# Altium PCB NavMergeBoard.PcbDoc
Units mil, origin at the board's own origin, x right, y up, seen from the top; angles counter-clockwise.
Board outline 2930 x 2770 mil, 4 copper layers (Top Layer, Internal Plane 1, Signal Layer 1, Bottom Layer), stack 30.634 mil thick; 104 components, 84 nets, 435 pads, 106 vias.
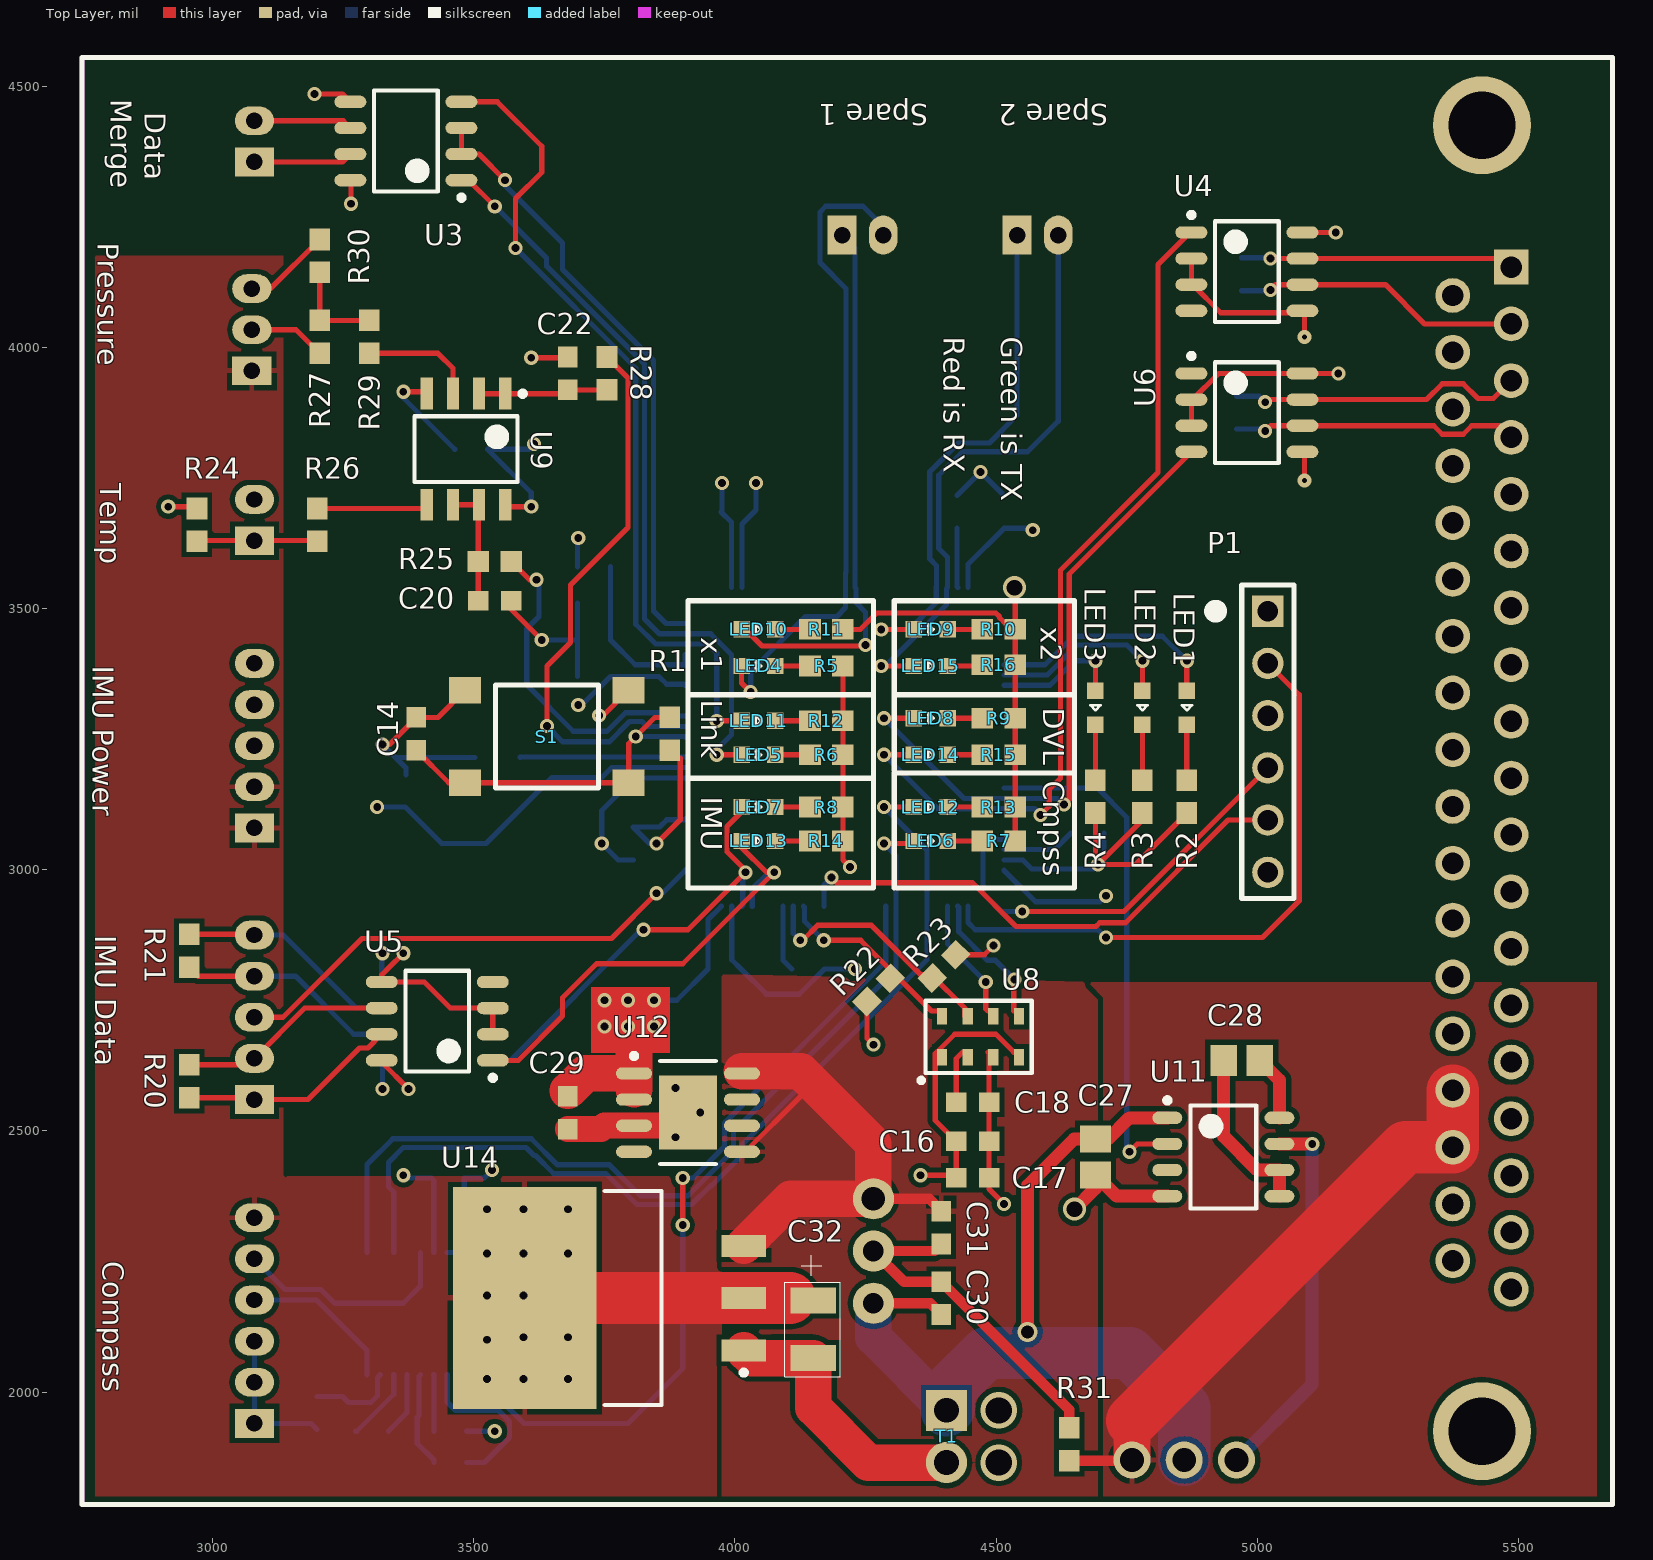
[diagram p0: Top Layer view]
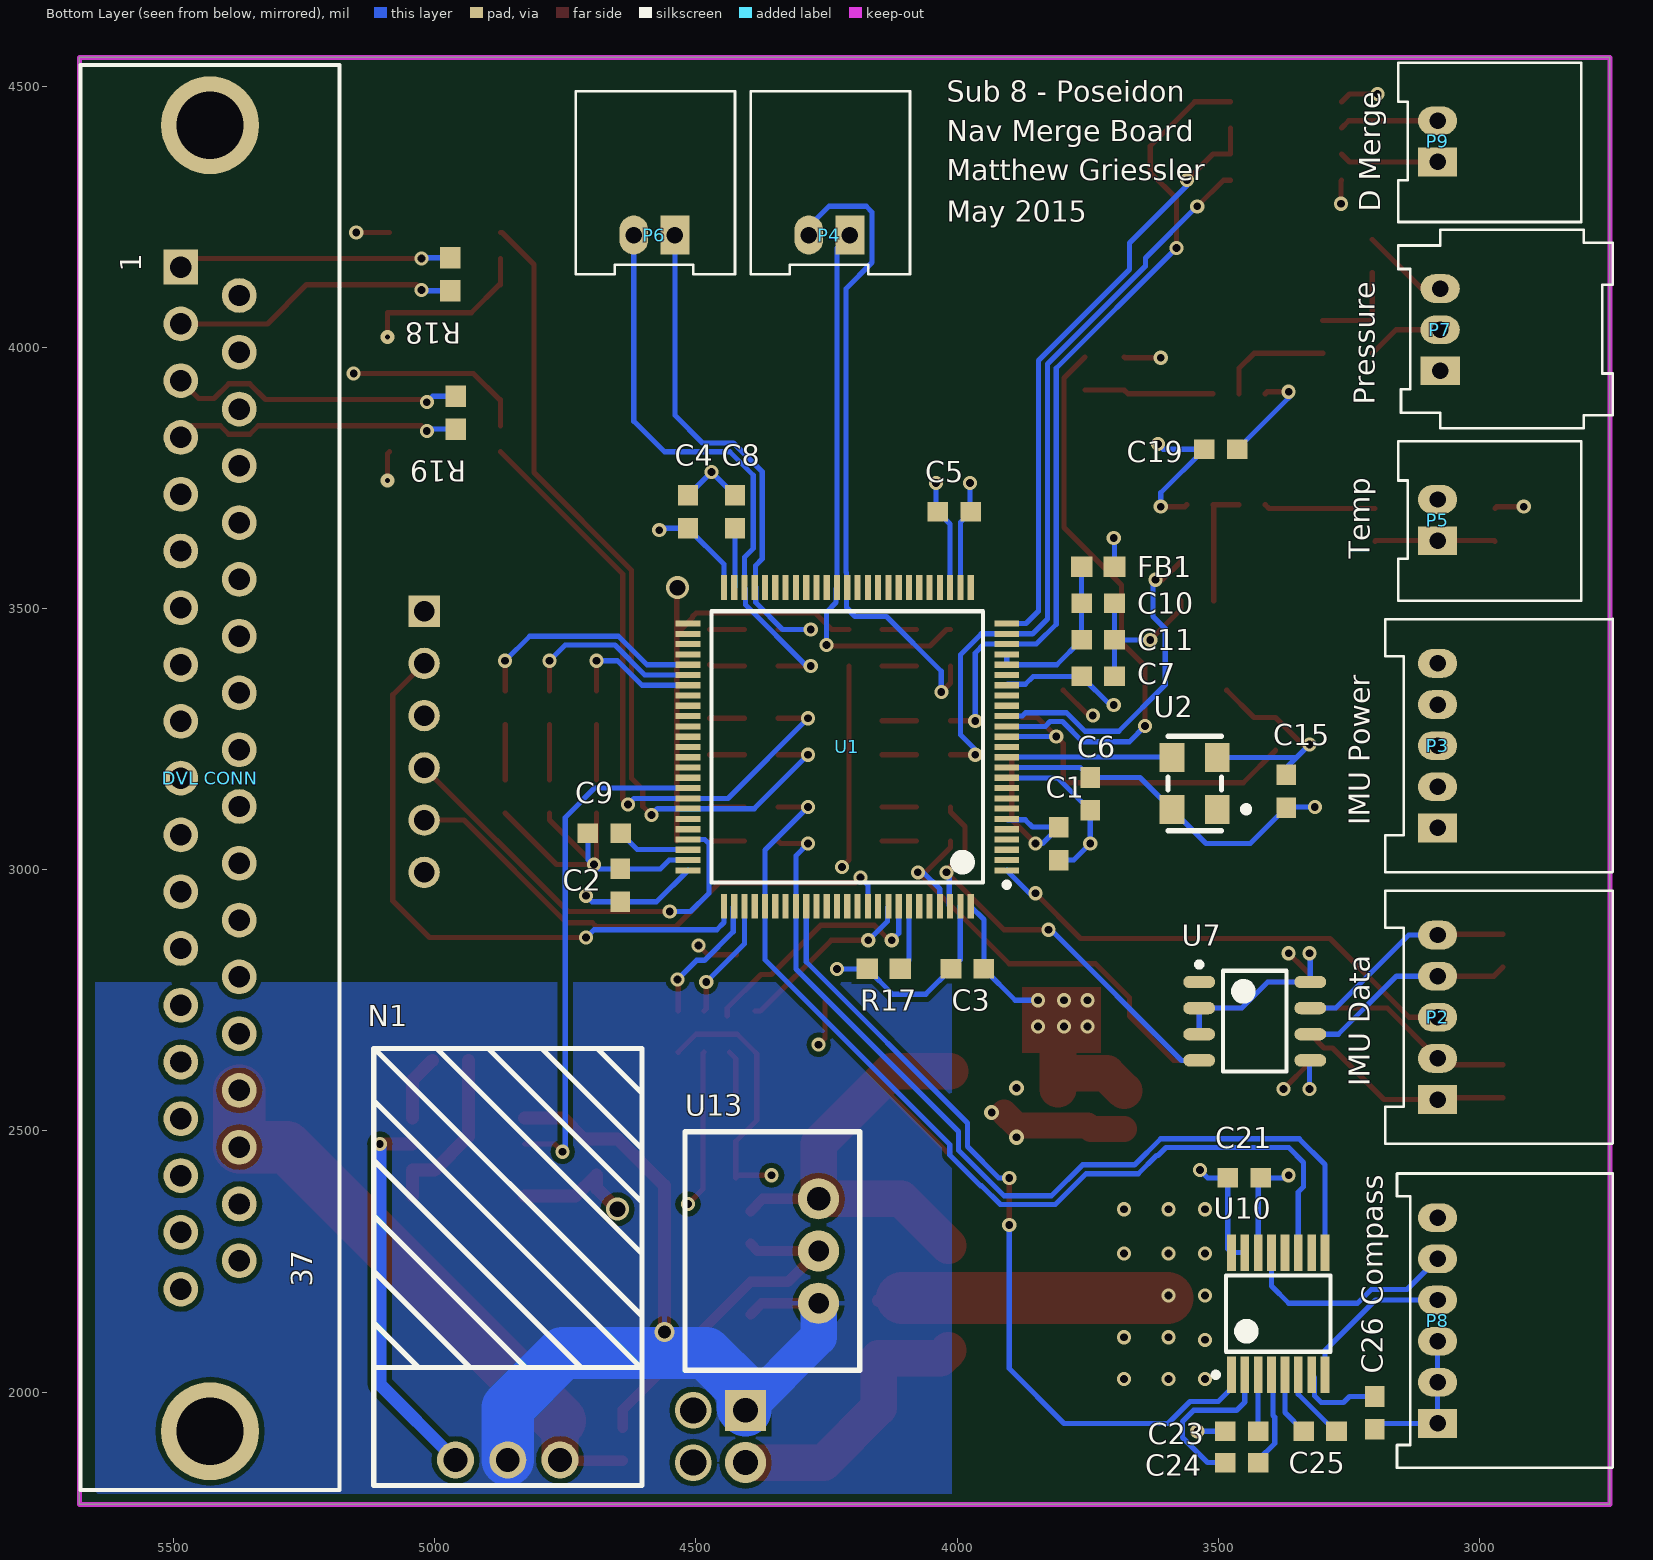
[diagram p1: Bottom Layer view, seen from below]
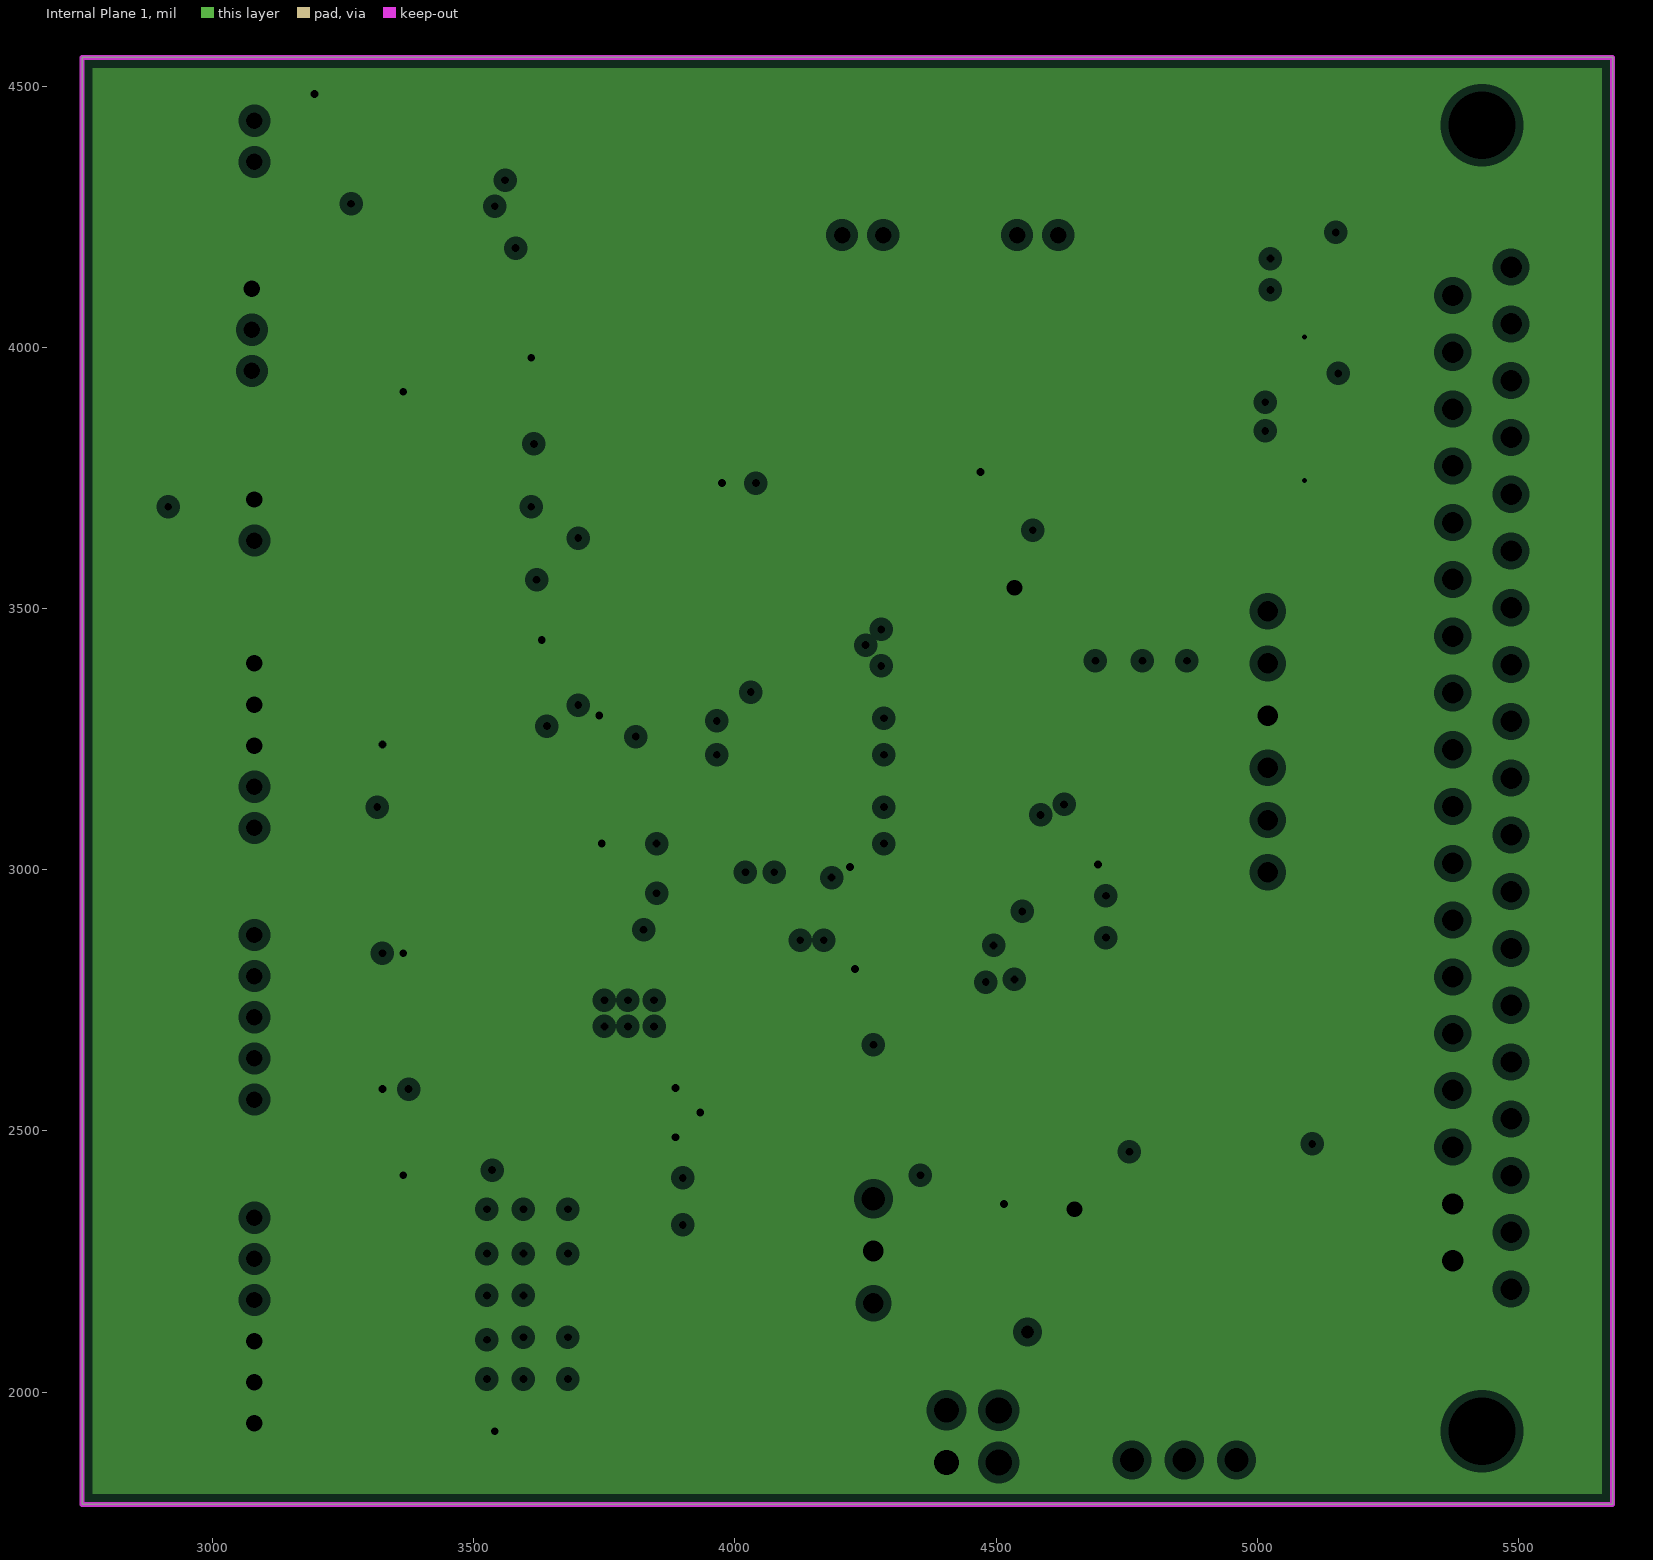
[diagram p2: Internal Plane 1, clearances drawn from the general rule]
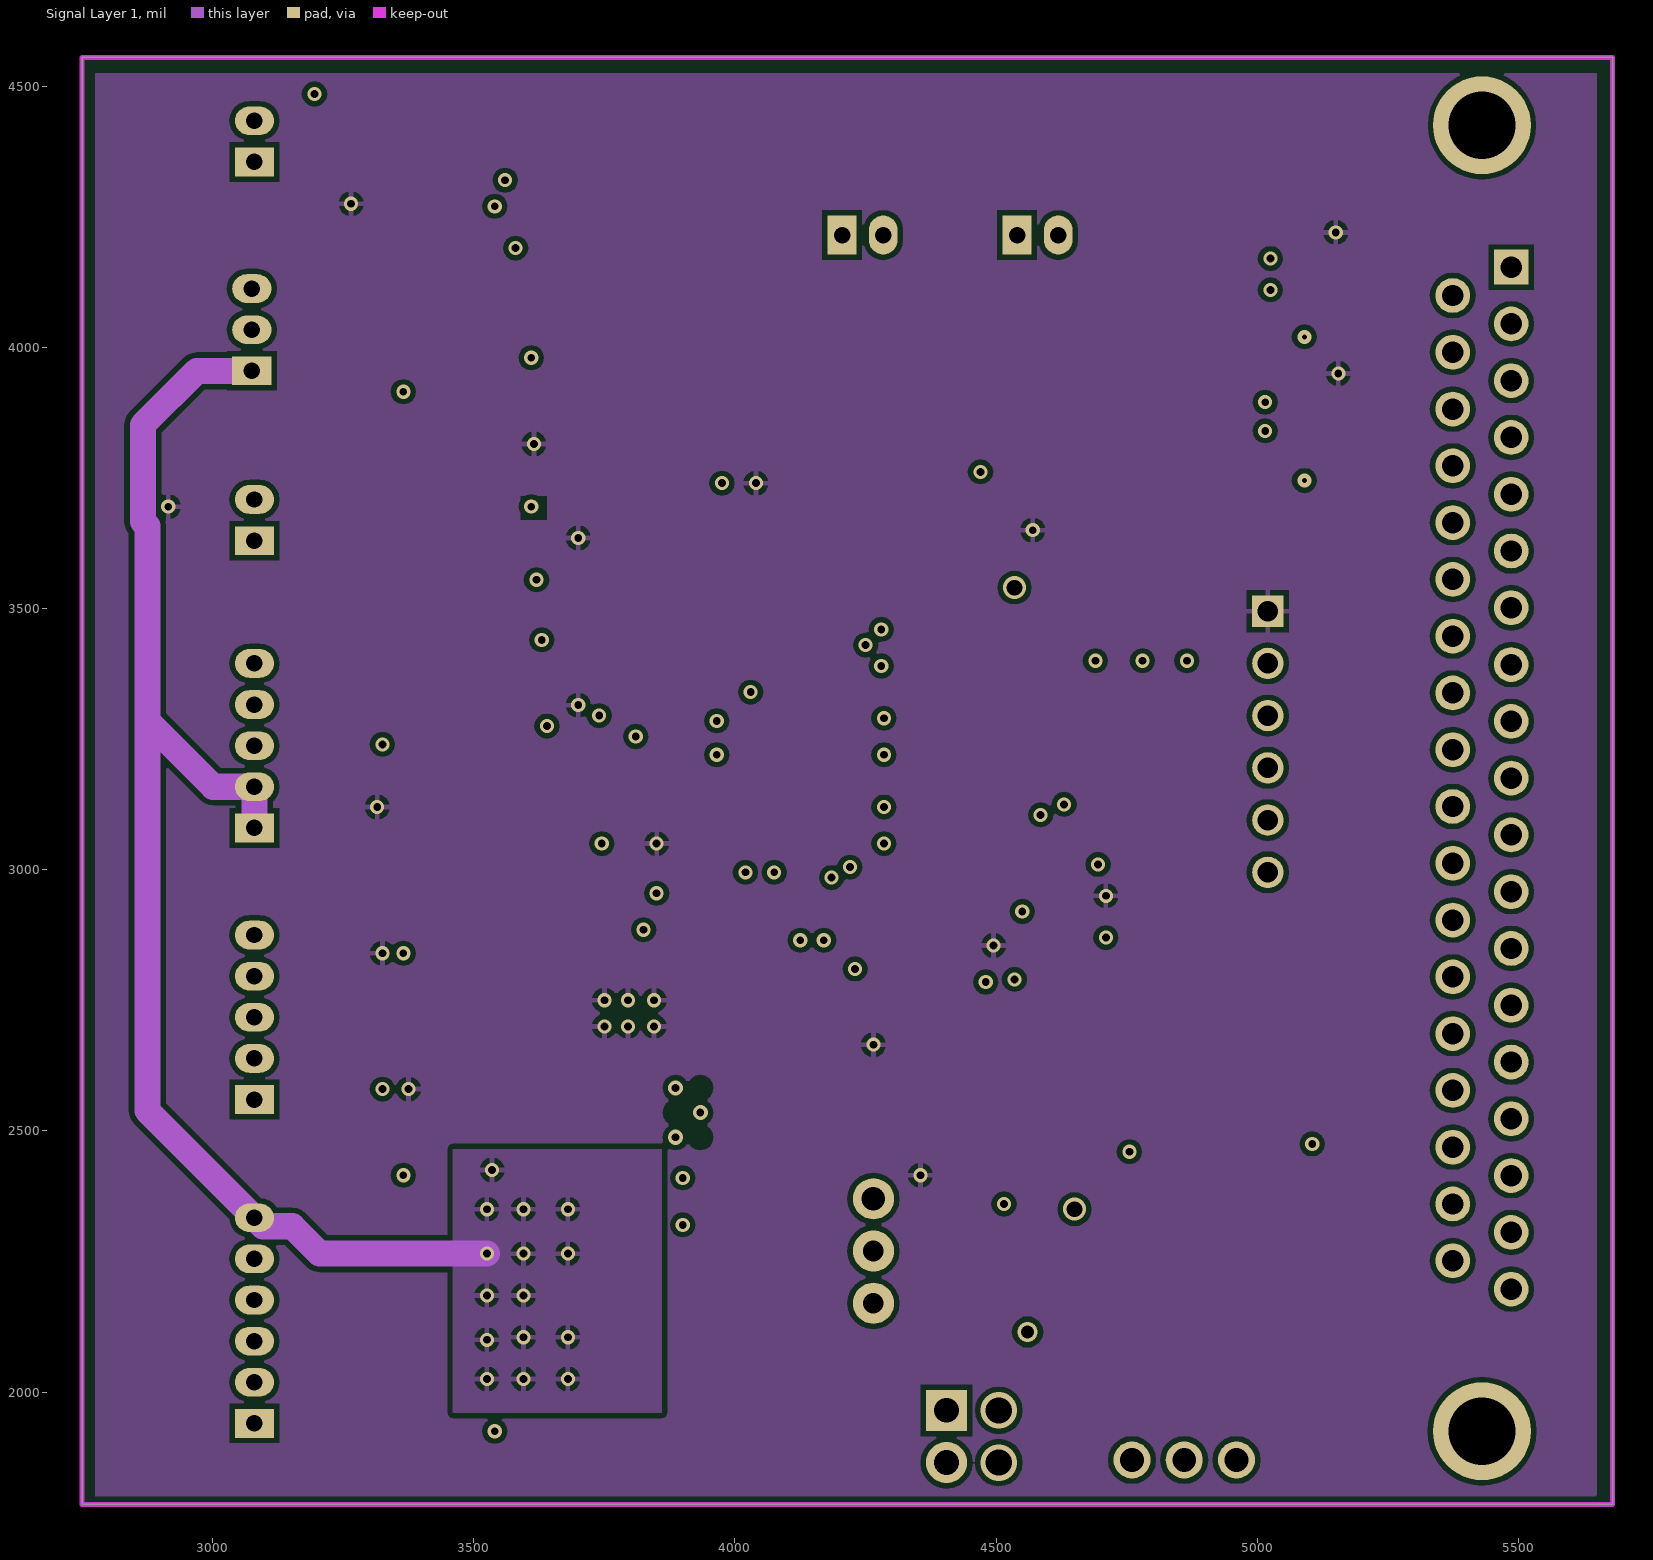
[diagram p3: Signal Layer 1]

## Layer stack, top to bottom
Top Solder: solder mask 0.4, Solder Resist, Dk 3.5
Top Layer: signal copper 1.4
Dielectric 1: core 10, FR-4, Dk 4.2
Internal Plane 1: plane copper 1.417, net GND
Dielectric 2: core 10, Dk 4.2
Signal Layer 1: signal copper 1.417
Dielectric 3: prepreg 5, Dk 4.2
Bottom Layer: signal copper 1.4
Bottom Solder: solder mask 0.4, Solder Resist, Dk 3.5

## Board outline
2750,1785 2750,4555 5680,4555 5680,1785

## Design rules (kind name [scope] priority, off if disabled: settings)
Clearance [All] p1: gap=10 except(7: Track-Track Track-SMDPad SMDPad-SMDPad)
HoleSize [All] p1: absolutevalues=TRUE maxlimit=400 minlimit=1 maxpercent=80.000 minpercent=20.000
MinimumAnnularRing MinimumAnnularRing_1 [IsPad] p1: minimumring=7
MinimumAnnularRing [IsVia] p2: minimumring=5
MinimumSolderMaskSliver [All] p1: minsoldermaskwidth=1
PlaneClearance [All] p1: clearance=15
PlaneConnect [All] p1: planeconnectstyle=Relief reliefexpansion=15 reliefentries=4 reliefconductorwidth=10 reliefairgap=10
PolygonConnect [All] p1: connectstyle=Relief reliefconductorwidth=10 reliefentries=4 polygonreliefangle="90 Angle" airgapwidth=10
RoutingVias [All] p1: holewidth=10 width=27 viastyle="Through Hole" minholewidth=10 minwidth=27 maxholewidth=28 maxwidth=50
SilkToSolderMaskClearance [IsPad] p1: minsilkscreentomaskgap=5 clearancetoexposedcopper=TRUE
SolderMaskExpansion [All] p1: expansion=4
Width [All] p1: maxlimit=100 minlimit=10 preferedwidth=10
25 further rules are at their usual default settings.

## Classes and differential pairs
component class CPU: C1 C2 C3 C4 C5 C6 C7 C8 C9 C10 C11 C14 C15 FB1 LED1 LED2 LED3 LED4 LED5 LED6 LED7 LED8 LED9 LED10 LED11 LED12 LED13 LED14 LED15 P1 P9 R1 R2 R3 R4 R5 R6 R7 R8 R9 R10 R11 R12 R13 R14 R15 R16 R17 S1 U1 U2 U3
component class NavMergeBoard: C16 C17 C18 C19 C20 C21 C22 C23 C24 C25 C26 "DVL CONN" P2 P3 P4 P5 P6 P7 P8 R18 R19 R20 R21 R22 R23 R24 R25 R26 R27 R28 R29 R30 U4 U5 U6 U7 U8 U9 U10
component class Power: C27 C28 C29 C30 C31 C32 N1 R31 T1 U11 U12 U13 U14

## Components (designator, comment, footprint, x,y, rotation, side; value= is the part's Value field where it differs from the comment)
C1 "Cap" CAPC0603 3805,3050 r270 bottom
C2 "Cap" CAPC0603 4645,2970 r90 bottom
C3 "Cap" CAPC0603 3980,2810 r0 bottom
C4 "Cap" CAPC0603 4515,3685 r90 bottom
C5 "Cap" CAPC0603 4005,3685 r180 bottom
C6 "Cap" CAPC0603 3745,3145 r270 bottom
C7 "Cap" CAPC0603 3730,3370 r180 bottom
C8 "Cap" CAPC0603 4425,3685 r90 bottom
C9 "Cap" CAPC0603 4675,3070 r0 bottom
C10 "Cap" CAPC0603 3730,3510 r180 bottom
C11 "Cap" CAPC0603 3730,3440 r180 bottom
C14 "Cap" CAPC0603 3390,3260 r90 top
C15 "Cap" CAPC0603 3370,3150 r90 bottom
C16 "Cap" CAPC0603 4455,2480 r0 top
C17 "Cap" CAPC0603 4455,2410 r0 top
C18 "Cap" CAPC0603 4455,2555 r0 top
C19 "Cap" CAPC0603 3495,3805 r180 bottom
C20 "Cap" CAPC0603 3540,3515 r0 top
C21 "Cap" CAPC0603 3450,2410 r180 bottom
C22 "Cap" CAPC0603 3680,3950 r90 top
C23 "Cap" CAPC0603 3455,1925 r0 bottom
C24 "Cap" CAPC0603 3455,1865 r180 bottom
C25 "Cap" CAPC0603 3305,1925 r180 bottom
C26 "Cap" CAPC0603 3200,1960 r270 bottom
C27 "Cap" CAPC0805 4690,2450 r270 top
C28 "Cap" CAPC0805 4970,2635 r180 top
C29 "Cap" CAPC0603 3680,2535 r270 top
C30 "Cap" CAPC0603 4395,2180 r90 top
C31 "Cap" CAPC0603 4395,2315 r270 top
C32 "Cap Tant" 1206 4150,2120 r270 top
"DVL CONN" "DB37" "DSUB37_ FEMALE" 5430,1925 r90 bottom
FB1 "FBead" RES0603 3730,3580 r180 bottom
LED1 "LED" LED0603 4865,3310 r270 top
LED2 "LED" LED0603 4780,3310 r270 top
LED3 "LED" LED0603 4690,3310 r270 top
LED4 "LED" LED0603 4045,3390 r0 top
LED5 "LED" LED0603 4045,3220 r0 top
LED6 "LED" LED0603 4375,3055 r0 top
LED7 "LED" LED0603 4045,3120 r0 top
LED8 "LED" LED0603 4375,3290 r0 top
LED9 "LED" LED0603 4375,3460 r0 top
LED10 "LED" LED0603 4045,3460 r0 top
LED11 "LED" LED0603 4045,3285 r0 top
LED12 "LED" LED0603 4375,3120 r0 top
LED13 "LED" LED0603 4045,3055 r0 top
LED14 "LED" LED0603 4375,3220 r0 top
LED15 "LED" LED0603 4375,3390 r0 top
N1 "NMOSFET_TO-220" "TO-220AB Heatsink" 4860,1870 r180 bottom
P1 "SWD" SWD_STM32 5020,3495 r0 top
P2 "MOLEX-HDR-1x5-SHERLOCK_RA" "MOLEX-HDR-1X5-SHERLOCK- RA" 3080,2560 r270 bottom
P3 "MOLEX-HDR-1x5-SHERLOCK_RA" "MOLEX-HDR-1X5-SHERLOCK- RA" 3080,3080 r270 bottom
P4 "2-pin Horz Sherlock" MOLEX-HDR-1X2-SHERLOCK-HORZ 4205,4215 r180 bottom
P5 "2-pin Horz Sherlock" MOLEX-HDR-1X2-SHERLOCK-HORZ 3080,3630 r270 bottom
P6 "2-pin Horz Sherlock" MOLEX-HDR-1X2-SHERLOCK-HORZ 4540,4215 r180 bottom
P7 "3pos RA sherlock connector" MOLEX-HDR-1X3-SHERLOCK-RA 3075,3955 r270 bottom
P8 "Sherlock 1x6 RA" "MOLEX-HDR-1X6-SHERLOCK- RA" 3080,1940 r270 bottom
P9 "2-pin Horz Sherlock" MOLEX-HDR-1X2-SHERLOCK-HORZ 3080,4355 r270 bottom
R1 "Res" RES0603 3875,3260 r90 top
R2 "Res" RES0603 4865,3140 r270 top
R3 "Res" RES0603 4780,3140 r270 top
R4 "Res" RES0603 4690,3140 r270 top
R5 "Res" RES0603 4175,3390 r0 top
R6 "Res" RES0603 4175,3220 r0 top
R7 "Res" RES0603 4505,3055 r0 top
R8 "Res" RES0603 4175,3120 r0 top
R9 "Res" RES0603 4505,3290 r0 top
R10 "Res" RES0603 4505,3460 r0 top
R11 "Res" RES0603 4175,3460 r0 top
R12 "Res" RES0603 4175,3285 r0 top
R13 "Res" RES0603 4505,3120 r0 top
R14 "Res" RES0603 4175,3055 r0 top
R15 "Res" RES0603 4505,3220 r0 top
R16 "Res" RES0603 4505.12,3392.48 r0 top
R17 "Res" RES0603 4140,2810 r0 bottom
R18 "Res" RES0603 4970,4140 r270 bottom
R19 "Res" RES0603 4960,3875 r270 bottom
R20 "Res" RES0603 2955,2595 r90 top
R21 "Res" RES0603 2955,2845 r270 top
R22 "Res" RES0603 4275,2770 r45 top
R23 "Res" RES0603 4400,2815 r225 top
R24 "Res" RES0603 2970,3660 r270 top
R25 "Res" RES0603 3540,3590 r0 top
R26 "Res" RES0603 3200,3660 r90 top
R27 "Res" RES0603 3205,4020 r90 top
R28 "Res" RES0603 3755,3950 r90 top
R29 "Res" RES0603 3300,4020 r270 top
R30 "Res" RES0603 3205,4175 r90 top
R31 "Res" RES0603 4640,1900 r90 top
S1 "Button" PTS645xxxxSMTR92 3640,3255 r180 top
T1 "1725656" 1725656 4405,1965 r0 top
U1 "STM32F429VIT6" STM32F429VIT6 4210,3235 r0 bottom
U2 "25MHz" 636L3C 3545,3165 r90 bottom
U3 "SP3485" SP3485 3370,4395 r180 top
U4 "SP3485" SP3485 4980,4145 r0 top
U5 "SP3485" SP3485 3430,2710 r180 top
U6 "SP3485" SP3485 4980,3875 r0 top
U7 "SP3485" SP3485 3430,2710 r180 bottom
U8 "MPL3115A2" MPL3115A2 4470,2680 r90 top
U9 "OPA2340" OPA2340 3485,3805 r270 top
U10 "SP3220E" SP3220ECY-L/TR 3385,2150 r90 bottom
U11 "MIC5021" MIC5021 4935,2450 r0 top
U12 "BD33GA5WEFJ-E2" BD33GA5WEFJ-E2 3910,2535 r0 top
U13 "R-78C9.0-1.0" R-78C12-1.0 4265,2170 r90 bottom
U14 "5V LDO Regulator" DPAK254P1435X464-4N 3745,2180 r180 top

## Footprints (in the part's own frame and the unit in brackets; to place one, negate y for a bottom-side part, rotate by r counter-clockwise, add the part's x,y. Pads: shape width x height; smd on the part's side, far side on the other; paste and mask are expansions set on the pad)
636L3C [mm]
  rect 1.4x1.2 smd: 1(-1.27,-1.1) 2(1.27,-1.1) 3(1.27,1.1) 4(-1.27,1.1)
  silkscreen extent -2.3,-2.65 2.3,1.3, body extent -2.5,-1.6 2.5,1.6, height 2
1206 [mil]
  rect 50x87 smd: 1(-55,0) 2(55,0)
  silkscreen extent -142,-55 91,51, body extent -75,-43 75,43, height 75
1725656 [mm] "CONN TERM BLOCK 2.54MM 2POS"
  rect 2x2 hole 1.2: 1(0,0)
  round 2 hole 1.2: 2(0,-2.54)
BD33GA5WEFJ-E2 [mm] "IC REG LDO 3.3V 0.5A 8HTSOP-J"
  oval 1.75x0.6 smd: 1(-2.625,1.905) 2(-2.625,0.635) 3(-2.625,-0.635) 4(-2.625,-1.905) 5(2.625,-1.905) 6(2.625,-0.635) 7(2.625,0.635) 8(2.625,1.905)
  rect 2.8x3.6 smd: 3(0,0)
  silkscreen extent -2.75,-2.5 1.35,2.88, body extent -2,-2.5 2,2.5, height 1
CAPC0603 [mm] "Chip Capacitor, 2-Leads, Body 1.60x0.80mm, IPC Medium Density"
  rect 1x0.95 smd: 1(-0.8,0) 2(0.8,0)
  body extent -0.88,-0.48 0.87,0.48, height 0.8
CAPC0805 [mm] "Chip Capacitor, 2-Leads, Body 2.01x1.25mm, IPC Medium Density"
  rect 1.3x1.5 smd: 1(-0.875,0) 2(0.875,0)
  body extent -1.1,-0.72 1.11,0.72, height 1.8
DPAK254P1435X464-4N [mm] "D2-PAK, 4-Pads, Body 7.55x8.56mm (max), IPC Medium Density"
  rect 2.16x1.07 smd: 1(-6.9,2.54) 2(-6.9,0) 3(-6.9,-2.54)
  rect 6.99x10.8 smd: 4(3.75,0)
  silkscreen extent -7.03,-5.2 -0.15,5.2, body extent -2.9,-5.2 5.99,5.2, height 4.64
"DSUB37_ FEMALE" [mm] "Connector; D Subminiature; 37 Position; Straight Female"
  round 4.76 hole 3.26: 0(0,0) 0(63.506,0)
  rect 1.69x1.69 hole 1.041: 1(56.607,1.42)
  round 1.69 hole 1.041: 2(53.846,1.42) 3(51.085,1.42) 4(48.324,1.42) 5(45.563,1.42) 6(42.802,1.42) 7(40.041,1.42) 8(37.28,1.42) 9(34.519,1.42) 10(31.758,1.42) 11(28.997,1.42) 12(26.236,1.42) 13(23.475,1.42) 14(20.714,1.42) 15(17.953,1.42) 16(15.192,1.42) 17(12.431,1.42) 18(9.67,1.42) 19(6.909,1.42) 20(55.227,-1.42) 21(52.466,-1.42) 22(49.705,-1.42) 23(46.944,-1.42) 24(44.183,-1.42) 25(41.422,-1.42) 26(38.661,-1.42) 27(35.9,-1.42) 28(33.139,-1.42) 29(30.378,-1.42) 30(27.617,-1.42) 31(24.856,-1.42) 32(22.095,-1.42) 33(19.334,-1.42) 34(16.573,-1.42) 35(13.812,-1.42) 36(11.051,-1.42) 37(8.29,-1.42)
  silkscreen extent -2.86,-6.3 66.43,6.3, body extent -2.85,-6.3 66.45,6.25, height 11.84
LED0603 [mm] "Chip LED, 2-Leads, Body 1.60x0.80mm, IPC Medium Density"
  rect 0.8x0.8 smd: A(-0.825,0) C(0.825,0)
  silkscreen extent -0.13,-0.25 0.12,0.25, body extent -0.88,-0.48 0.87,0.47, height 0.8
MIC5021 [mm] "SOIC, 8-Leads, Body 4.90x3.90mm, Pitch 1.27mm, IPC Medium Density"
  oval 1.45x0.6 smd: 1(-2.725,1.905) 2(-2.725,0.635) 3(-2.725,-0.635) 4(-2.725,-1.905) 5(2.725,-1.905) 6(2.725,-0.635) 7(2.725,0.635) 8(2.725,1.905)
  silkscreen extent -2.85,-2.5 1.6,2.88, body extent -2,-2.5 2,2.5, height 1.63
MOLEX-HDR-1X2-SHERLOCK-HORZ [mm]
  rect 1.397x1.905 hole 0.8: 1(0,0)
  oval 1.397x1.905 hole 0.8: 2(-2,0)
  silkscreen extent -4.83,-1.91 2.92,6.98, body extent -4.83,-1.91 2.87,8.59, height 5.54
MOLEX-HDR-1X3-SHERLOCK-RA [mm]
  rect 1.397x1.905 hole 0.8: 1(0,0)
  oval 1.397x1.905 hole 0.8: 2(-2,0) 3(-4,0)
  silkscreen extent -6.86,-2.03 2.79,8.38, body extent -6.88,-1.99 2.82,8.51, height 5.75
"MOLEX-HDR-1X5-SHERLOCK- RA" [mm]
  rect 1.397x1.905 hole 0.8: 1(0,0)
  oval 1.397x1.905 hole 0.8: 2(-2,0) 3(-4,0) 4(-6,0) 5(-8,0)
  silkscreen extent -10.16,-2.55 2.15,8.51, body extent -10.16,-1.96 2.14,8.54, height 5.54
"MOLEX-HDR-1X6-SHERLOCK- RA" [mm]
  rect 1.397x1.905 hole 0.8: 1(0,0)
  oval 1.397x1.905 hole 0.8: 2(-2,0) 3(-4,0) 4(-6,0) 5(-8,0) 6(-10,0)
  silkscreen extent -12.15,-1.97 2.15,8.51, body extent -12.15,-1.95 2.15,8.55, height 5.54
MPL3115A2 [mm] "LGA, 8-Leads, Body 2.65x4.65mmx1.20mm, Pitch 1.00mm"
  rect 0.8x0.5 smd: 1(-1,1.875) 2(-1,0.625) 3(-1,-0.625) 4(-1,-1.875) 5(1,-1.875) 6(1,-0.625) 7(1,0.625) 8(1,1.875)
  silkscreen extent -2.22,-2.49 1.76,2.99, body extent -1.33,-2.32 1.32,2.32, height 1.2
OPA2340 [mm] "SOIC, 8-Leads, Body 4.90x3.90mm, Pitch 1.27mm, IPC Medium Density"
  rect 1.55x0.6 smd: 1(-2.7,1.905) 2(-2.7,0.635) 3(-2.7,-0.635) 4(-2.7,-1.905) 5(2.7,-1.905) 6(2.7,-0.635) 7(2.7,0.635) 8(2.7,1.905)
  silkscreen extent -2.82,-2.5 1.6,2.88, body extent -2,-2.5 2,2.5, height 1.75
PTS645xxxxSMTR92 [mm] "PTS645 Series SMT 6 mm Tactile Switch"
  rect 1.555x1.3 smd: A(-3.975,2.25) A(3.975,2.25) B(-3.975,-2.25) B(3.975,-2.25)
  silkscreen extent -2.5,-2.5 2.5,2.5, body extent -3,-3 3,3, height 4.5
R-78C12-1.0 [mm] "CONV DC/DC 1A 12V OUT SIP VERT"
  round 2 hole 1: 1(0,0) 2(2.54,0)
  round 2 hole 1.15: 3(5.08,0)
  silkscreen extent -3.26,-2 8.34,6.5, body extent -3.2,-1.9 8.3,6.5, height 10.8
RES0603 [mm] "Chip Resistor, 2-Leads, Body 1.60x0.80mm, IPC Medium Density"
  rect 1.05x1 smd: 1(-0.8,0) 2(0.8,0)
  body extent -0.88,-0.48 0.87,0.47, height 0.8
SP3220ECY-L/TR [mm] "TSOP, 16-Leads, Body 5.00x4.40mm, Pitch 0.65mm, IPC Medium Density"
  rect 1.78x0.42 smd: 1(-2.97,2.275) 2(-2.97,1.625) 3(-2.97,0.975) 4(-2.97,0.325) 5(-2.97,-0.325) 6(-2.97,-0.975) 7(-2.97,-1.625) 8(-2.97,-2.275) 9(2.97,-2.275) 10(2.97,-1.625) 11(2.97,-0.975) 12(2.97,-0.325) 13(2.97,0.325) 14(2.97,0.975) 15(2.97,1.625) 16(2.97,2.275)
  silkscreen extent -3.09,-2.55 1.85,3.16, body extent -2.25,-2.55 2.25,2.55, height 1.2
SP3485 [mm] "SOIC, 8-Leads, Body 4.90x3.90mm, Pitch 1.27mm, IPC Medium Density"
  oval 1.55x0.6 smd: 1(-2.7,1.905) 2(-2.7,0.635) 3(-2.7,-0.635) 4(-2.7,-1.905) 5(2.7,-1.905) 6(2.7,-0.635) 7(2.7,0.635) 8(2.7,1.905)
  silkscreen extent -2.83,-2.45 1.55,2.88, body extent -1.95,-2.45 1.95,2.45, height 1.75
STM32F429VIT6 [mm] "TSQFP, 100-Leads, Body 14.00x14.00mm, Pitch 0.50mm, IPC Medium Density"
  rect 1.2x0.3 smd: 1(-7.75,6) 2(-7.75,5.5) 3(-7.75,5) 4(-7.75,4.5) 5(-7.75,4) 6(-7.75,3.5) 7(-7.75,3) 8(-7.75,2.5) 9(-7.75,2) 10(-7.75,1.5) 11(-7.75,1) 12(-7.75,0.5) 13(-7.75,0) 14(-7.75,-0.5) 15(-7.75,-1) 16(-7.75,-1.5) 17(-7.75,-2) 18(-7.75,-2.5) 19(-7.75,-3) 20(-7.75,-3.5) 21(-7.75,-4) 22(-7.75,-4.5) 23(-7.75,-5) 24(-7.75,-5.5) 25(-7.75,-6) 51(7.75,-6) 52(7.75,-5.5) 53(7.75,-5) 54(7.75,-4.5) 55(7.75,-4) 56(7.75,-3.5) 57(7.75,-3) 58(7.75,-2.5) 59(7.75,-2) 60(7.75,-1.5) 61(7.75,-1) 62(7.75,-0.5) 63(7.75,0) 64(7.75,0.5) 65(7.75,1) 66(7.75,1.5) 67(7.75,2) 68(7.75,2.5) 69(7.75,3) 70(7.75,3.5) 71(7.75,4) 72(7.75,4.5) 73(7.75,5) 74(7.75,5.5) 75(7.75,6)
  rect 0.3x1.2 smd: 26(-6,-7.75) 27(-5.5,-7.75) 28(-5,-7.75) 29(-4.5,-7.75) 30(-4,-7.75) 31(-3.5,-7.75) 32(-3,-7.75) 33(-2.5,-7.75) 34(-2,-7.75) 35(-1.5,-7.75) 36(-1,-7.75) 37(-0.5,-7.75) 38(0,-7.75) 39(0.5,-7.75) 40(1,-7.75) 41(1.5,-7.75) 42(2,-7.75) 43(2.5,-7.75) 44(3,-7.75) 45(3.5,-7.75) 46(4,-7.75) 47(4.5,-7.75) 48(5,-7.75) 49(5.5,-7.75) 50(6,-7.75) 76(6,7.75) 77(5.5,7.75) 78(5,7.75) 79(4.5,7.75) 80(4,7.75) 81(3.5,7.75) 82(3,7.75) 83(2.5,7.75) 84(2,7.75) 85(1.5,7.75) 86(1,7.75) 87(0.5,7.75) 88(0,7.75) 89(-0.5,7.75) 90(-1,7.75) 91(-1.5,7.75) 92(-2,7.75) 93(-2.5,7.75) 94(-3,7.75) 95(-3.5,7.75) 96(-4,7.75) 97(-4.5,7.75) 98(-5,7.75) 99(-5.5,7.75) 100(-6,7.75)
  silkscreen extent -7.87,-6.6 6.6,6.82, body extent -7,-7 7,7, height 1.6
SWD_STM32 [mil] "SWD connector matching the pinout on STM Discovery Boards"
  rect 60x60 hole 39.37: 1(0,0)
  round 60 hole 39.37: 2(0,-100) 3(0,-200) 4(0,-300) 5(0,-400) 6(0,-500)
  silkscreen extent -110,-550 50,50
"TO-220AB Heatsink" [mm] "HEXFET Power MOSFET w/ Heat Sink"
  round 1.8 hole 1.15: D(0,0) G(-2.54,0) S(2.54,0)
  silkscreen extent -6.53,-1.25 6.52,20, body extent -6.44,-0.15 6.36,19.9, height 12.7

## Part data
C32: library part CapPol, "CAP TANT 47UF 10V 10% 1411"
"DVL CONN": library part DVLCONN, "DVL Connector using DSUB37"
FB1: "Ferrite Bead"
N1: "NMOSFET_TO-220-Template"
P1: library part SWD_STM32, "SWD connector matching the pinout on STM Discovery Boards"
P2 P3: "Header, Molex, 2mm Pitch Sherlock Header, Single Row, Vertical, 5 Circuits, Length 3.3mm, 0353620550"
P4 P5 P6 P9: library part MOLEX-HDR-1x2-SHERLOCK_RA, "Header, Molex, 2mm Pitch Sherlock Header, Single Row, Horizontal, 2 Circuits, Length 3.3mm,  0353630260"
P7: library part MOLEX-HDR-1x3-SHERLOCK_RA, "Header, Molex, 2mm Pitch Sherlock Header, Single Row, Right Angle 3 Circuits, Length 3.3mm"
P8: library part MOLEX-HDR-1x6-SHERLOCK_RA, "CONN HEADER 6POS 2MM R/A TIN"
S1: "SPST Button"
T1: "CONN TERM BLOCK 2.54MM 2POS"
U1: "IC MCU ARM 2MB FLASH 100LQFP"
U2: library part 636L3C, "HCMOS/TTL Clock Oscillator"
U3 U4 U5 U6 U7: "IC TXRX RS485 HALF DUPLEX 8NSOIC"
U8: "IC ALTIMETER I2C VERSION 8LGA"
U9: "IC OPAMP GP 5.5MHZ RRO 8SOIC"
U10: "IC DVR/RCVR RS232 ESD 16TSSOP"
U11: "IC DRIVER MOSFET HISIDE HS 8SOIC"
U12: "IC REG LDO 3.3V 0.5A 8HTSOP-J"
U13: library part R-78C9-1.0, "945-1396-5-ND"
U14: library part LM1086ISX-5.0, "IC REG LDO 5V 1.5A DDPAK"

## Via types
v1: diameter 27, hole 15, Top Layer to Bottom Layer, tented both sides, 82 vias
v2: diameter 27, hole 15, Top Layer to Bottom Layer, tented bottom, 14 vias
v3: diameter 29, hole 15, Top Layer to Bottom Layer, tented top, 3 vias
v4: diameter 27, hole 10, Top Layer to Bottom Layer, tented both sides, 2 vias
v5: diameter 70, hole 50, Top Layer to Bottom Layer, tented both sides, 2 vias
v6: diameter 44, hole 30, Top Layer to Bottom Layer, tented both sides, 2 vias
v7: diameter 39, hole 25, Top Layer to Bottom Layer, tented both sides, 1 vias

## Nets (pads, with @x,y where several pads share a name; then routed paths per layer and width w, separated by ;. In a path a pad name is that pad's centre, name@x,y a point inside that pad or via, vN(x,y) a via of type N, cw(c..) or ccw(c..) an arc to the next point about the centre after c; other vN are vias at no path point)
3V3: C1.1 C2.1 C3.1 C4.1 C5.1 C6.1 C7.1 C15.1 C16.1 C17.1 C19.1 C29.1 FB1.2 P1.1 R1.1 R22.1 R23.1 R24.1 U1.6 U1.11 U1.19 U1.28 U1.50 U1.75 U1.100 U2.4 U3.8 U4.8 U5.8 U6.2 U6.3 U6.8 U7.2 U7.3 U7.8 U8.1 U8.4 U9.8 U12.1 U12.2 | length 4362
  Top Layer w10: v1(2915,3695) 2966.5,3695 R24.1 ; U3.8 3265,4318.7 v1(3265,4275) ; U5.8 3323.7,2631.3 v1(3375,2580) ; U9.8 3563.7,3695 v1(3610,3695) ; v1(3850,3050) 3895,3095 3895,3213.5 ; R22.1 4252.73,2677.27 v1(4265,2665) ; v1(4355,2415) 4418.5,2415 C17.1 C16.1 4383.5,2520 4383.5,2647.95 4386.18,2650.63 4420.55,2685 4499.45,2685 4533.82,2650.63 ; R23.1 4477.27,2837.27 v1(4495,2855) ; U6.3 U6.2 4876.08,3900 4926.08,3950 U6.8 v1(5155,3950) ; U4.8 v1(5150,4220)
  Top Layer w70: C29.1@3680,2576.5 3713.5,2610 U12.1 ; 3806.65,2580 U12.1 ; v1@3806.65,2698.35 U12.1
  Bottom Layer w10: v1(3315,3120) 3368.5,3120 C15.1 3438.5,3050 3523.31,3050 U2.4 3649.8,3176.5 C6.1 3764.13,3195.63 U1.11 ; v1(3325,2840) 3323.7,2838.7 U7.8 3405,2785 3455,2735 U7.2 U7.3 ; v1(3610,3695) 3610,3721.5 C19.1 3605,3805 v1(3615,3815) ; FB1.2 3698.5,3633.5 v1(3700,3635) ; v1(3700,3315) 3706.5,3315 C7.1 3854.15,3370 3869.26,3354.89 3903.1,3354.89 U1.19 ; v1(3845,2750) 3888.5,2750 C3.1 3948.5,2904.61 U1.100 ; v1(3850,3050) 3836.5,3050 C1.1 3855.33,3081.5 3869.26,3095.43 3903.1,3095.43 U1.6 ; U1.28 4013.15,3661.65 C5.1 4040,3688.5 v1(4040,3740) ; U1.50 4446.22,3584.72 C4.1 4566.5,3653.5 v1(4570,3650) ; U1.75 4575.39,2938.5 C2.1 4698.5,2938.5 v1(4710,2950)
  other v1: 3750,2700 3795,2700 3845,2700 3750,2750 3795,2750
3V3A: C10.1 C11.1 FB1.1 U1.21 U1.22 | length 322.8
  Bottom Layer w10: FB1.1 C10.1 C11.1 3809.02,3392.48 U1.21 U1.22
5V: C21.1 C32.1 P3.1 P3.2 P7.1 P8.6 U10.15 U10.16 U14.2 U14.4 | length 3453.1
  Top Layer w25: 4105,2180 4145,2180 C32.1
  Top Layer w100: U14.4 U14.2 4105,2180
  Signal Layer 1 w50: P7.1 2970,3955 2866.5,3851.5 2866.5,3666.41 2875,3657.91 2875,3285 ; P3.1 P3.2 3001.26,3158.74 2875,3285 ; v2(3525,2265) 3204.96,2265 3152.5,2317.46 3096.24,2317.46 P8.6 2875,2538.7 2875,3285
  Bottom Layer w10: U10.15 U10.16 3481.5,2273.86 C21.1 3520,2410 v1(3535,2425)
  other v2: 3525,2025 3595,2025 3680,2025 3525,2100 3595,2105 3680,2105 3525,2185 3595,2185 3595,2265 3680,2265 3525,2350 3595,2350 3680,2350
9V: C31.1 U12.5 U12.8 U13.3 U14.3 | length 1043.8
  Top Layer w10: U12.5 4019.66,2460 4126.19,2566.53 4126.19,2613.81
  Top Layer w20: U13.3 4371.5,2370 C31.1
  Top Layer w70: U12.8@4013.35,2613.81 4126.19,2613.81 4265,2475 U13.3 4106.65,2370 U14.3
CLK: U1.12 U2.3 | length 317.2
  Bottom Layer w10: U2.3 3588.31,3215.63 U1.12@3904.88,3215.63
COMPASS_RX_232: P8.4 U10.8 | length 302
  Bottom Layer w10: P8.4 3198.78,2176.22 3295.43,2079.57 U10.8
COMPASS_RX_EN: U1.84 U10.1 | length 1580.1
  Top Layer w10: v1(3900,2320) v1(3900,2410)
  Bottom Layer w10: U10.1 3474.57,2007.43 3500,1982 3554.04,1982 3596.04,1940 3795,1940 3900,2045 v1(3900,2320) ; v1(3900,2410) 3920,2410 3980,2470 3980,2515 4288.74,2823.74 U1.84
COMPASS_RX_TTL: LED6.A U1.83 U10.9 | length 1757.1
  Top Layer w10: v1(4285,3050) 4337.52,3050 LED6.A
  Bottom Layer w10: U10.9 3295.43,2435.43 3345,2485 3610,2485 3660,2435 3760,2435 3819.04,2375.96 3910,2375.96 3997,2462.96 3997,2498.72 4308.43,2810.14 U1.83 4308.43,3026.57 v1(4285,3050)
COMPASS_TX_232: P8.5 U10.13 | length 430.7
  Bottom Layer w10: P8.5 3138.74,2196.22 3207.06,2196.22 3233.28,2170 3365,2170 3397.8,2202.8 U10.13
COMPASS_TX_TTL: LED12.A U1.80 U10.11 | length 1854.7
  Top Layer w10: v1(4285,3120) LED12.A
  Bottom Layer w10: U10.11 3346.61,2382.97 3336.5,2393.08 3336.5,2439.5 3365,2468 3600,2468 3615,2453 3617.96,2453 3652.96,2418 3752.96,2418 3812,2358.96 3917.04,2358.96 3953.08,2395 3955,2395 4014,2454 4014,2474 4367.48,2827.48 U1.80 4367.48,3037.52 v1(4285,3120)
DM+: P9.1 U3.7 | length 189.9
  Top Layer w10: P9.1 3248.7,4355 U3.7
DM-: P9.2 U3.6 | length 189.4
  Top Layer w10: P9.2 3249.96,4433.74 U3.6
DM_RX: LED5.A U1.24 U3.1 | length 1439.7
  Top Layer w10: U3.1 3490,4320 v1(3540,4270) ; v1(3965,3220) LED5.A
  Bottom Layer w10: v1(3540,4270) 3540.3,4270 3639.04,4171.26 3639.04,4155 3640,4155 3827,3968 3827,3480 3855.46,3451.54 U1.24 3953.46,3451.54 3993.5,3411.5 3993.5,3258.5 3965,3230 v1(3965,3220)
DM_TX: LED11.A U1.23 U3.4 | length 1575.2
  Top Layer w10: U3.4 3545,4470 3630,4385 3630,4335 3580,4285 v1(3580,4190) ; v1(3965,3285) LED11.A
  Bottom Layer w10: v1(3580,4190) 3810,3960 3810,3470 3848.15,3431.85 U1.23 3948.15,3431.85 3965,3415 v1(3965,3285)
DM_W/R: U1.25 U3.2 U3.3 | length 1167.8
  Top Layer w10: U3.3 U3.2 3510,4370 v1(3560,4320)
  Bottom Layer w10: v1(3560,4320) 3560,4310 3670,4200 3670,4149.04 3844,3975.04 3844,3495 3867.78,3471.22 U1.25
DVL_PWR: "DVL CONN.34" "DVL CONN.35" N1.S R31.1 | length 1135.4
  Top Layer w20: R31.1 4758.5,1868.5 N1.S
  Top Layer w70: N1.S 4760,1945
  Top Layer w100: 4760,1945 5283.77,2468.77 5374.09,2468.77 5374.09,2577.47
DVL_PWR_SW: U1.67 U11.2 | length 979.2
  Top Layer w10: v1(4755,2460) 4770,2475 U11.2
  Bottom Layer w10: U1.67 4693.74,3156.26 4750,3100 4750,2465 v1(4755,2460)
DVL_RX: LED14.A U1.69 U4.1 | length 1641.1
  Top Layer w10: v1(4285,3220) LED14.A ; v1(4585,3105) 4601.5,3121.5 4601.5,3153.5 4623,3175 4623,3573.34 4810,3760.34 4810,4158.67 4871.33,4220 U4.1
  Bottom Layer w10: v1(4285,3220) 4388.11,3116.89 U1.69 4573.11,3116.89 v1(4585,3105)
DVL_RX+: "DVL CONN.1" R18.1 U4.7 | length 523.3
  Top Layer w10: v1(5025,4170) U4.7 5469.54,4170 5485.91,4153.63
  Bottom Layer w10: R18.1 5023.5,4171.5 v1(5025,4170)
DVL_RX-: "DVL CONN.2" R18.2 U4.6 | length 551.8
  Top Layer w10: v1(5025,4110) 5035,4120 U4.6 5245,4120 5320.07,4044.93 5485.91,4044.93
  Bottom Layer w10: R18.2 5023.5,4108.5 v1(5025,4110)
DVL_TX: LED8.A U1.68 U6.4 | length 1246.8
  Top Layer w10: v1(4285,3290) LED8.A ; v1(4630,3125) 4640,3135 4640,3566.3 U6.4
  Bottom Layer w10: v1(4285,3290) 4438.43,3136.57 U1.68 4618.43,3136.57 v1(4630,3125)
DVL_TX+: "DVL CONN.3" R19.1 U6.7 | length 571.2
  Top Layer w10: v1(5015,3895) 5020,3900 U6.7 5323.96,3900 5354.1,3930.15 5394.09,3930.15 5422.36,3901.87 5451.55,3901.87 5485.91,3936.23
  Bottom Layer w10: R19.1 5003.5,3906.5 v1(5015,3895)
DVL_TX-: "DVL CONN.4" R19.2 U6.6 | length 554.4
  Top Layer w10: v1(5015,3840) 5025,3850 U6.6 5337.71,3850 5354.1,3833.61 5394.09,3833.61 5410.48,3850 5463.43,3850 5485.91,3827.53
  Bottom Layer w10: R19.2 5011.5,3843.5 v1(5015,3840)
GND: "DVL CONN.36" "DVL CONN.37" C1.2 C2.2 C3.2 C4.2 C5.2 C6.2 C7.2 C8.2 C9.2 C10.2 C11.2 C14.2 C15.2 C16.2 C17.2 C18.2 C19.2 C20.2 C21.2 C22.2 C23.2 C26.2 C27.2 C29.2 C30.2 C31.2 C32.2 P1.3 P3.3 P3.4 P3.5 P5.2 P7.3 P8.1 P8.2 P8.3 R2.2 R3.2 R4.2 R5.2 R6.2 R7.2 R8.2 R9.2 R10.2 R11.2 R12.2 R13.2 R14.2 R15.2 R16.2 R17.2 R30.2 R31.2 S1.B T1.2 U1.10 U1.27 U1.74 U1.99 U2.2 U3.5 U4.2 U4.3 U4.5 U5.2 U5.3 U5.5 U6.5 U7.5 U8.3 U9.4 U10.14 U11.4 U12.3 U13.2 U14.1 | length 7617.8
  Top Layer w10: P7.3 3110.98,4112.48 R30.2 ; v1(3195,4485) 3248.7,4485 U3.5 ; v1(3325,3240) 3338.5,3240 C14.2 3431.42,3291.5 S1.B@3483.5,3343.58 ; v1(3365,2840) 3365,2839.7 3336.8,2811.5 3336.5,2811.5 3323.7,2798.7 U5.5 3405,2785 3455,2735 U5.3 U5.2 ; v1(3365,3915) 3406.3,3915 U9.4 ; C20.2 3571.5,3498.5 v1(3630,3440) ; v1(3610,3980) 3678.5,3980 C22.2 ; v1(3740,3295) 3747.91,3295 S1.B@3796.5,3343.58 ; R5.2 R12.2 R6.2 R8.2 R14.2 4206.5,3018.5 v1(4220,3005) ; R11.2 4239.69,3460 4271.38,3491.69 4499.14,3491.69 4506.17,3484.66 4506.17,3482.2 4528.37,3460 R10.2 ; 4484.61,2650.63 4486.5,2648.74 C18.2 C16.2 C17.2 4486.5,2388.5 v1(4515,2360) ; v6(4535,3540) 4536.5,3538.5 R10.2 ; R7.2 R13.2 R15.2 R9.2 R10.2 ; R4.2 4690,3015 v1(4695,3010) ; R3.2 4780,3095 v1(4695,3010) ; R2.2 4766.5,3010 v1(4695,3010) ; U4.2 U4.3 4876.08,4120 4929.78,4066.3 5090,4066.3 v4(5090,4020) ; U6.5 5090,3796.3 v4(5090,3745)
  Top Layer w20: C31.2 4381.5,2270 U13.2 4323.5,2211.5 C30.2 4640,1966.5 R31.2
  Top Layer w25: v6(4650,2350) 4690,2390 C27.2 4730.55,2375 U11.4
  Top Layer w50: C29.2 3743.5,2503.5 3750,2510 3806.65,2510 3885,2510 U12.3@3910,2535
  Top Layer w70: U14.1 4031.65,2065 C32.2 4150,1970 4255,1865 T1.2
  Bottom Layer w10: P8.3 P8.2 P8.1 3188.5,1940 C26.2 ; U7.5 3325,2633.7 v1(3325,2580) ; v1(3325,3240) 3350,3215 ; v1(3365,2415) 3370,2410 C21.2 3423.39,2405.12 U10.14 ; v1(3365,3915) 3365,3903.5 C19.2 ; C15.2 3370,3195 3350,3215 ; C23.2 v1(3540,1925) ; U2.2 3350,3215 ; v1(3630,3440) C11.2 ; C7.2 C11.2 ; C10.2 C11.2 ; C1.2 3776.5,3018.5 v1(3745,3050) C6.2 3807.13,3175.63 U1.10@3904.88,3175.63 ; v1(3975,3740) 3975,3686.5 C5.2 3993.46,3665.04 U1.27 ; U1.99@3993.78,2929.88 3993.78,2827.72 C3.2 4060,2761.5 4122.99,2761.5 R17.2 v1(4230,2810) ; C8.2 v1(4470,3761.5) C4.2 ; U1.74@4515.12,3018.78 4550.74,3018.78 4568.02,3001.5 C2.2 4686.5,3001.5 v1(4695,3010) ; 4706.5,3018.5 C9.2
  other v3: 3886.38,2487.76 3933.62,2535 3886.38,2582.24
IMU_NRST: P2.3 U1.1 | length 941.4
  Top Layer w10: P2.3 3134.7,2717.48 3285.72,2868.5 3763.5,2868.5 v1(3850,2955)
  Bottom Layer w10: v1(3850,2955) 3861.1,2955 U1.1
IMU_RX: LED13.A U1.97 U5.1 | length 891.3
  Top Layer w10: U5.1 3585,2635 3670,2720 3670,2755 3735,2820 3900,2820 v1(4075,2995) 4060.3,2995 4012.52,3042.79 LED13.A
  Bottom Layer w10: U1.97 4032.83,2962.83 4065,2995 v1(4075,2995)
IMU_RX+: P2.1 R20.1 U5.7 | length 421.9
  Top Layer w10: R20.1 3076.5,2563.5 P2.1 3182.38,2560 3281.19,2658.81 3297.51,2658.81 U5.7
IMU_RX-: P2.2 R20.2 U5.6 | length 413.6
  Top Layer w10: R20.2 3067.76,2626.5 P2.2 3176.26,2735 U5.6
IMU_TX: LED7.A U1.98 U7.4 | length 851.9
  Top Layer w10: v1(3825,2885) 3910,2885 v1(4020,2995) 4020,2999.05 3984.77,3034.28 3984.77,3082.75 4012.52,3110.5 LED7.A
  Bottom Layer w10: U7.4 3570,2635 3820,2885 v1(3825,2885) ; U1.98 4014.93,2931.66 4014.93,2989.93 v1(4020,2995)
IMU_TX+: P2.5 R21.1 U7.7 | length 427.3
  Top Layer w10: R21.1 3078.46,2876.5 P2.5
  Bottom Layer w10: P2.5 3135.04,2874.96 3275,2735 U7.7
IMU_TX-: P2.4 R21.2 U7.6 | length 421.9
  Top Layer w10: R21.2 2972.28,2796.22 P2.4
  Bottom Layer w10: P2.4 3158.78,2796.22 3270,2685 U7.6
INTER_PRES_INT1: U1.78 U8.6 | length 232.7
  Top Layer w10: v1(4480,2785) 4480,2733.98 4484.61,2729.37
  Bottom Layer w10: U1.78 4406.85,2858.15 v1(4480,2785)
INTER_PRES_INT2: U1.77 U8.5 | length 254.9
  Top Layer w10: 4533.82,2729.37 4533.82,2788.82 v1(4535,2790)
  Bottom Layer w10: U1.77 4428.31,2928.1 4428.31,2881.38 4483.19,2826.5 4498.5,2826.5 v1(4535,2790)
LED0: LED3.A U1.57 | length 251.8
  Top Layer w10: LED3.A v1(4690,3400)
  Bottom Layer w10: U1.57 4603.11,3353.11 4650,3400 v1(4690,3400)
LED1: LED2.A U1.56 | length 358.5
  Top Layer w10: LED2.A v1(4780,3400)
  Bottom Layer w10: U1.56 4597.8,3372.8 4655,3430 4750,3430 v1(4780,3400)
LED2: LED1.A U1.55 | length 449.5
  Top Layer w10: LED1.A v1(4865,3400)
  Bottom Layer w10: U1.55 4593.44,3392.48 4647.96,3447 4818,3447 v1(4865,3400)
NetC8_1: C8.1 U1.49 | length 114
  Bottom Layer w10: C8.1 4425,3541.65 U1.49
NetC9_1: C9.1 U1.73 | length 141.3
  Bottom Layer w10: U1.73@4515.12,3038.78 4612.28,3038.78 C9.1
NetC18_1: C18.1 U8.2 | length 100.6
  Top Layer w10: C18.1 4423.5,2638.74 4435.39,2650.63
NetC20_1: C20.1 R25.1 U9.6 U9.7 | length 234.3
  Top Layer w10: U9.6 U9.7 3508.5,3697.2 R25.1 C20.1
NetC22_1: C22.1 R28.1 U9.1 U9.2 | length 248
  Top Layer w10: U9.2 U9.1 3672.8,3911.3 C22.1 R28.1
NetC23_1: C23.1 U10.3 | length 108.1
  Bottom Layer w10: U10.3 3423.5,2032.95 C23.1
NetC24_1: C24.1 U10.2 | length 319.4
  Bottom Layer w10: U10.2 3448.98,1981.02 3465,1965 3547,1965 3568.5,1943.5 3568.5,1913.19 3520.3,1865 C24.1
NetC24_2: C24.2 U10.4 | length 183.7
  Bottom Layer w10: U10.4 3395,2030.28 3395,1955.03 3391.82,1951.85 3391.82,1901.33 3423.5,1869.64 C24.2
NetC25_1: C25.1 U10.5 | length 122.9
  Bottom Layer w10: C25.1 3372.2,1960.71 U10.5
NetC25_2: C25.2 U10.6 | length 139.8
  Bottom Layer w10: C25.2 3275.92,1925 3346.61,1995.69 U10.6
NetC26_1: C26.1 U10.7 | length 168.1
  Bottom Layer w10: C26.1 3248.5,1991.5 3260,1980 3302.64,1980 3315.7,1993.06 3315.7,2027.75 U10.7
NetC28_1: C28.1 U11.8 | length 125.7
  Top Layer w25: C28.1 5042.28,2597.17 U11.8
NetC28_2: C28.2 U11.5 U11.6 | length 329
  Top Layer w25: C28.2 4935.55,2489.45 5000,2425 U11.6 U11.5
NetLED1_C: LED1.C R2.1 | length 106
  Top Layer w10: R2.1 LED1.C
NetLED2_C: LED2.C R3.1 | length 106
  Top Layer w10: R3.1 LED2.C
NetLED3_C: LED3.C R4.1 | length 106
  Top Layer w10: R4.1 LED3.C
NetLED4_C: LED4.C R5.1 | length 66
  Top Layer w10: LED4.C R5.1
NetLED5_C: LED5.C R6.1 | length 66
  Top Layer w10: LED5.C R6.1
NetLED6_C: LED6.C R7.1 | length 66
  Top Layer w10: LED6.C R7.1
NetLED7_C: LED7.C R8.1 | length 66
  Top Layer w10: LED7.C R8.1
NetLED8_C: LED8.C R9.1 | length 66
  Top Layer w10: LED8.C R9.1
NetLED9_C: LED9.C R10.1 | length 66
  Top Layer w10: LED9.C R10.1
NetLED10_C: LED10.C R11.1 | length 66
  Top Layer w10: LED10.C R11.1
NetLED11_C: LED11.C R12.1 | length 66
  Top Layer w10: LED11.C R12.1
NetLED12_C: LED12.C R13.1 | length 66
  Top Layer w10: LED12.C R13.1
NetLED13_C: LED13.C R14.1 | length 66
  Top Layer w10: LED13.C R14.1
NetLED14_C: LED14.C R15.1 | length 66
  Top Layer w10: LED14.C R15.1
NetLED15_C: LED15.C R16.1 | length 67.2
  Top Layer w10: LED15.C 4471.14,3390 R16.1
NetN1_G: N1.G U11.7 | length 727.8
  Top Layer w25: U11.7 v1(5105,2475)
  Bottom Layer w25: N1.G 5105,2015 v1(5105,2475)
NetR17_1: R17.1 U1.94 | length 126.8
  Bottom Layer w10: U1.94 4091.89,2826.61 R17.1
NetR26_2: R26.2 U9.5 | length 213
  Top Layer w10: R26.2 3402.8,3691.5 U9.5
NetR27_2: R27.2 R29.1 R30.1 | length 181.3
  Top Layer w10: R27.2 R30.1 ; R27.2@3210.67,4051.5 R29.1
NetR29_2: R29.2 U9.3 | length 220.5
  Top Layer w10: R29.2 3431.5,3988.5 3460,3960 U9.3
NJTRST: P1.5 U1.90 | length 1019.1
  Top Layer w10: v1(4185,2985) 4195,2975 4454.69,2975 4538.19,2891.5 4691.19,2891.5 4698.19,2898.5 4747.54,2898.5 4944.04,3095 P1.5
  Bottom Layer w10: U1.90 4170.63,2970.63 v1(4185,2985)
NRST: C14.1 R1.2 S1.A U1.14 | length 701.5
  Top Layer w10: C14.1 3452.09,3166.42 3483.5,3166.42 3796.5,3166.42 3796.5,3241.5 v1(3810,3255) 3846.5,3291.5 R1.2
  Bottom Layer w10: v1(3810,3255) 3904.57,3255 U1.14
PRESSURE: R28.2 U1.15 | length 1084.3
  Top Layer w10: v1(3640,3275) 3640,3390 3685,3435 3685,3545 3795,3655 3795,3941.5 R28.2
  Bottom Layer w10: v1(3640,3275) 3670,3245 3759.7,3245 3798.2,3283.5 3821.8,3283.5 3830.93,3274.37 U1.15
PRESSURE_IN: P7.2 R27.1 | length 148.7
  Top Layer w10: P7.2 3159.76,4033.74 R27.1
RAIL: C27.1 C30.1 N1.D T1.1 U11.1 U13.1 | length 1667.6
  Top Layer w20: U13.1 4373.5,2170 C30.1
  Top Layer w25: v7(4560,2115) 4560,2395 4649.45,2484.45 C27.1 4714.45,2484.45 4755,2525 U11.1
  Bottom Layer w70: U13.1 4265,2105 T1.1
  Bottom Layer w100: T1.1 4410,1970 4410,2004.35 4480.65,2075 4755,2075 4860,1970 N1.D
SCL: R22.2 U1.92 U8.8 | length 353.7
  Top Layer w10: v1(4170,2865) 4240.55,2865 4376.18,2729.37 4386.18,2729.37
  Bottom Layer w10: U1.92 4133.04,2928.1 4133.04,2901.29 4169.33,2865 v1(4170,2865)
SDA: R23.2 U1.93 U8.7 | length 477.8
  Top Layer w10: v1(4125,2865) 4129.69,2865 4158.19,2893.5 4261.26,2893.5 4355.39,2799.37 4375.39,2799.37 4440,2734.76 U8.7@4440,2720
  Bottom Layer w10: U1.93 4111.57,2878.43 v1(4125,2865)
SWCLK: P1.2 U1.76 | length 1185.7
  Top Layer w10: v1(4710,2870) 5010,2870 5080,2940 5080,3335 P1.2
  Bottom Layer w10: U1.76 4446.22,2898.78 4460,2885 4695,2885 v1(4710,2870)
SWDIO: P1.4 U1.72 | length 811.8
  Top Layer w10: v1(4550,2920) 4745,2920 P1.4
  Bottom Layer w10: U1.72 4482.83,3057.83 4475,3050 4475,2955 4510,2920 v1(4550,2920)
TEMPERATURE: R25.2 U1.16 | length 633.5
  Top Layer w10: R25.2 3606.5,3555 v1(3620,3555)
  Bottom Layer w10: v1(3620,3555) 3625,3550 3625,3485 3601.5,3461.5 3601.5,3353.8 3690.3,3265 3755,3265 3790.5,3300.5 3868.56,3300.5 3875,3294.06 U1.16
TEMPERATURE_IN: P5.1 R24.2 R26.1 | length 231.2
  Top Layer w10: R24.2 2971.5,3630 P5.1 3198.5,3630 R26.1
UART1_RX: LED4.A P4.2 U1.38 | length 1265.8
  Top Layer w10: LED4.A 4012.52,3357.48 v1(4030,3340)
  Bottom Layer w10: v1(4030,3340) 4030,3380 4135,3485 4195,3485 4211.78,3501.78 4211.78,3568.71 4212.68,3569.62 4212.68,4112.32 4162.5,4162.5 4162.5,4258.71 4173.79,4270 4245,4270 4283.74,4231.26 P4.2
UART1_TX: LED10.A P4.1 U1.39 | length 1054.9
  Top Layer w10: LED10.A 4020,3460 4051.69,3428.31 4248.31,3428.31 v1(4250,3430)
  Bottom Layer w10: P4.1 4229.68,4190.32 U1.39 4231.46,3538.34 4231.46,3511.53 4250,3492.99 v1(4250,3430)
UART2_RX: LED15.A P6.2 U1.48 | length 1119.6
  Top Layer w10: v1(4280,3390) LED15.A
  Bottom Layer w10: v1(4280,3390) 4287.9,3390 4405.07,3507.17 4405.07,3538.34 U1.48 4406.85,3598.15 4390,3615 4390,3755 4435,3800 4560,3800 4618.74,3858.74 P6.2
UART2_TX: LED9.A P6.1 U1.47 | length 1002.1
  Top Layer w10: v1(4280,3460) LED9.A
  Bottom Layer w10: v1(4280,3460) 4333.86,3460 4385.39,3511.53 4385.39,3540.75 4385.96,3541.32 4385.96,3582.04 4373,3595 4373,3762.04 4427.96,3817 4487,3817 4540,3870 P6.1
pads on no net: "DVL CONN.0" "DVL CONN.5" "DVL CONN.6" "DVL CONN.7" "DVL CONN.8" "DVL CONN.9" "DVL CONN.10" "DVL CONN.11" "DVL CONN.12" "DVL CONN.13" "DVL CONN.14" "DVL CONN.15" "DVL CONN.16" "DVL CONN.17" "DVL CONN.18" "DVL CONN.19" "DVL CONN.20" "DVL CONN.21" "DVL CONN.22" "DVL CONN.23" "DVL CONN.24" "DVL CONN.25" "DVL CONN.26" "DVL CONN.27" "DVL CONN.28" "DVL CONN.29" "DVL CONN.30" "DVL CONN.31" "DVL CONN.32" "DVL CONN.33" P1.6 U1.2 U1.3 U1.4 U1.5 U1.7 U1.8 U1.9 U1.13 U1.17 U1.18 U1.20 U1.26 U1.29 U1.30 U1.31 U1.32 U1.33 U1.34 U1.35 U1.36 U1.37 U1.40 U1.41 U1.42 U1.43 U1.44 U1.45 U1.46 U1.51 U1.52 U1.53 U1.54 U1.58 U1.59 U1.60 U1.61 U1.62 U1.63 U1.64 U1.65 U1.66 U1.70 U1.71 U1.79 U1.81 U1.82 U1.85 U1.86 U1.87 U1.88 U1.89 U1.91 U1.95 U1.96 U2.1 U4.4 U5.4 U6.1 U7.1 U10.10 U10.12 U11.3 U12.4 U12.6 U12.7
copper on no net:
  other v5: 4505,1865 4505,1965

## Polygon pours and split planes (outlines as drawn)
3V3 on Signal Layer 1 "3V3" (solid, pour order 4): 2775,4525 2775,1800 3400,1800 5650,1800 5650,4525
5V on Signal Layer 1 "3V3" (solid, pour order 2): 3460,2465 3460,1960 3860,1960 3860,2465
DVL_PWR on Top Layer "3V3" (solid, pour order 6): 5650,1800 5650,2785 4675,2785 4670,2790 4705,2755 4705,1800
9V on Top Layer "3V3" (solid, pour order 10): 3975,2800 3975,1800 4705,1800 4705,2785
5V on Top Layer "3V3" (solid, pour order 12): 3975,2413.12 3143.12,2413.12 3140,2410 3135,2415 3135,4175 2770,4175 2775,4170 2775,1800 3975,1800
RAIL on Bottom Layer "3V3" (solid, pour order 8): 5650,2785 4015,2785 4010,2790 4010,1805 5645,1805 5650,1810
GND on Internal Plane 1 (split plane): 5659.9,1805.1 2770.1,1805.1 2770.1,4534.9 5659.9,4534.9

## Keep-outs
Keep-Out Layer:
  the board outline again, w10

## Other copper
Top Layer:
  region net 3V3: 3725,2775 3725,2650 3875,2650 3875,2775
Signal Layer 1:
  pour cut-out: 3590,3715 3590,3670 3640,3670 3640,3715

## Silkscreen, mask and mechanical layers (free items; w line width, h text height)
Top Overlay:
  lines w10: 4305,2965 4305,3185 ; 4305,3190 4305,3335 ; 4310,2965 4650,2965 4650,3185 ; 4310,3185 4630,3185 ; 4615,3185 4630,3185 ; 3910,3175 3910,2965 4265,2965 4265,3175 ; 3910,3175 4265,3175 ; 3910,3175 3910,3335 ; 3910,3335 4265,3335 ; 3910,3335 3910,3515 4265,3515 4265,3335 ; 4265,3175 4265,3335 ; 4305,3335 4650,3335 ; 4305,3335 4305,3515 4650,3515 4650,3335 ; 4630,3185 4650,3185 ; 4650,3185 4650,3335 ; 2750,1785 5680,1785 5680,4555 2750,4555 2750,1785
  text "Merge" at 2805,4475 h40 r270
  text "Spare 1" at 4370,4465 h40 r180
  text "Spare 2" at 4715,4465 h40 r180
  text "Data" at 2870,4450 h40 r270
  text "Pressure" at 2780,4200 h40 r270
  text "Red is RX" at 4400,4020 h40 r270
  text "Green is TX" at 4510,4020 h40 r270
  text "Temp" at 2785,3740 h40 r270
  text "x2" at 4585,3465 h40 r270
  text "x1" at 3935,3445 h40 r270
  text "IMU Power" at 2770,3390 h40 r270
  text "Link" at 3935,3325 h40 r270
  text "DVL" at 4590,3310 h40 r270
  text "Cmpss" at 4590,3170 h40 r270
  text "IMU" at 3935,3140 h40 r270
  text "IMU Data" at 2775,2875 h40 r270
  text "Compass" at 2790,2250 h40 r270
Bottom Overlay:
  text "Sub 8 - Poseidon" at 4020,4470 h40
  text "Nav Merge Board" at 4020,4395 h40
  text "Matthew Griessler" at 4020,4320 h40
  text "D Merge" at 3190,4260 h40 r270
  text "May 2015" at 4020,4240 h40
  text "Pressure" at 3200,3890 h40 r270
  text "Temp" at 3210,3595 h40 r270
  text "IMU Power" at 3210,3085 h40 r270
  text "IMU Data" at 3210,2585 h40 r270
  text "Compass" at 3185,2165 h40 r270

## Text inside footprints (layer, text, board x,y; h text height)
"DVL CONN": Bottom Overlay "37" at 5234,2202 h40 r270; Bottom Overlay "1" at 5562,4145 h40 r270